# Altium PCB dev-board.PcbDoc (part 2 of 2)
Units mil, origin at the board's own origin, x right, y up, seen from the top; angles counter-clockwise.
Board outline 5607.36 x 5449.25 mil, 4 copper layers (Top Layer, Mid Layer 1, Mid Layer 2, Bottom Layer), stack 62.449 mil thick; 258 components, 114 nets, 705 pads, 139 vias.
Unrouted connection lines stored in the file: 225.
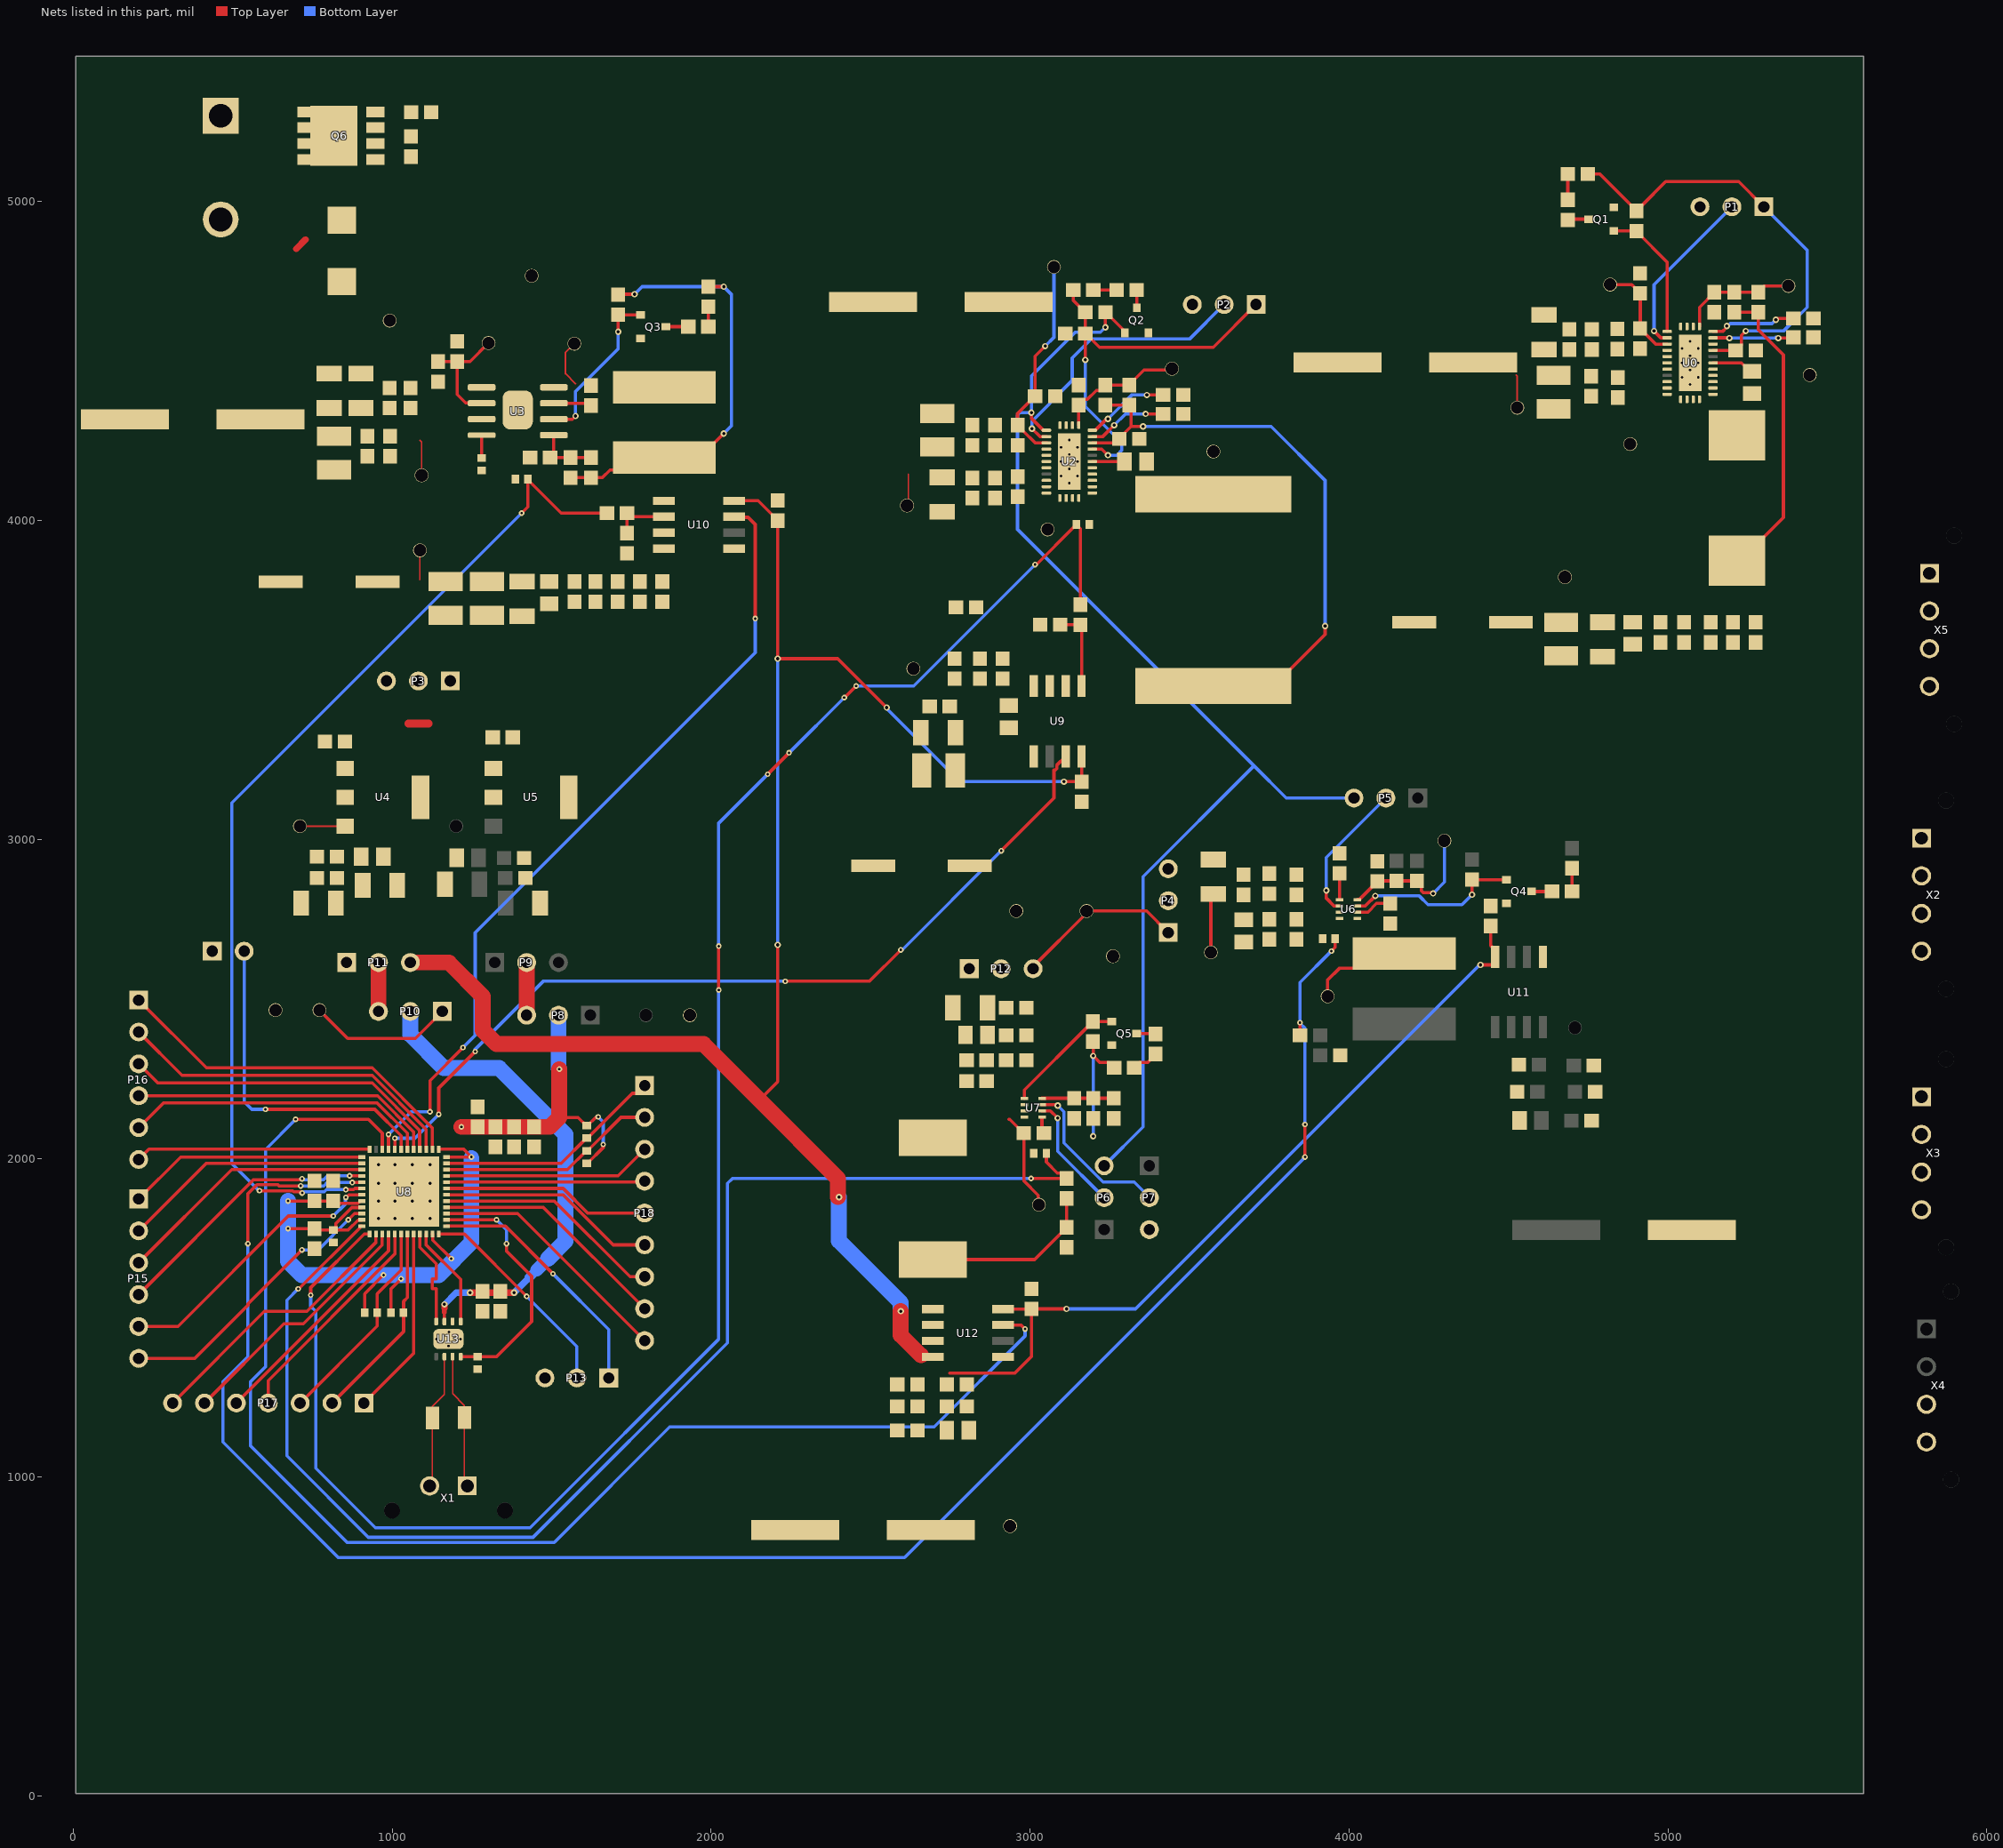
[diagram p2: the nets of this part, all layers, seen from the top]

## Via types
v1: diameter 20, hole 10, Top Layer to Bottom Layer, 59 vias
v2: diameter 17.72, hole 7.87, Top Layer to Bottom Layer, 56 vias
v3: diameter 11.81, hole 7.87, Top Layer to Bottom Layer, 24 vias

## Nets (pads, with @x,y where several pads share a name; then routed paths per layer and width w, separated by ;. In a path a pad name is that pad's centre, name@x,y a point inside that pad or via, vN(x,y) a via of type N, cw(c..) or ccw(c..) an arc to the next point about the centre after c; other vN are vias at no path point) (continued)
3V3_ONBOARD: P8.3 P9.2 | length 165.4
  Top Layer w50: P8.3@1421.26,2448.82 P9.2@1421.26,2614.17
3V3_TMP: R30.2 R33.2 U8.17 | length 6027
  Top Layer w10: v2(547.24,1732.28) 547.24,1888.67 575.69,1917.12 641.23,1917.12 644.97,1913.39 v2(712.6,1913.39) ; v2(874.58,1923.79) 875.2,1924.41 903.9,1924.41 U8.17@904.53,1925.04 ; R30.2@3846.46,2385.83 v2(3846.46,2425.2) ; v2(3862.2,2003.94) v2(3862.2,2106.3) ; v2(3944.88,2649.61) 3956.69,2661.42 R33.2@3956.69,2688.98
  Bottom Layer w10: v2(547.24,1732.28) 547.24,1377.95 468.5,1299.21 468.5,1110.24 830.71,748.03 2606.3,748.03 v2(3862.2,2003.94) ; v2(712.6,1913.39) 785.57,1913.41 795.95,1923.79 v2(874.58,1923.79) ; v2(3862.2,2106.3) 3862.2,2407.36 3846.46,2423.11 v2(3846.46,2425.2) 3846.46,2551.18 v2(3944.88,2649.61)
5V: C133.1 C134.1 P10.2 U13.3 | length 1539.3
  Top Layer w10: U13.3@1163.39,1488.19 1163.39,1517.72
  Top Layer w15: 1163.39,1517.72 1163.39,1529.53
  Top Layer w20: 1163.39,1529.53 v1(1163.39,1541.89) ; v1(1244.09,1578.74) v1(1381.89,1578.74)
  Bottom Layer w20: v1(1163.39,1541.89) 1200.23,1578.74 v1(1244.09,1578.74) ; v1(1381.89,1578.74) 1429.13,1625.98
  Bottom Layer w30: 1429.13,1625.98 1452.76,1649.61
  Bottom Layer w40: 1452.76,1649.61 1488.19,1685.04
  Bottom Layer w50: P10.2@1056.69,2460.63 1056.69,2388.19 1161.42,2283.46 1334.65,2283.46 1543.31,2074.8 1543.31,1740.16 1488.19,1685.04
5V_BUCK_MAIN: C43.1 C65.1 C100.1 C119.1 C124.1 C125.1 C126.1 C127.1 C128.1 C129.1 C130.1 P11.3 TP26.1 U9.8 U10.8 U11.8 U12.3 U12.4 U12.8 X5.P$1 X5.P$2 | length 8080.3
  Top Layer w10: U10.8@2072.05,4062.13 2147.52,4062.13 2208.66,4000.98 C65.1@2208.66,4000 v1(2208.66,3566.93) 2397.13,3566.93 v1(2550.33,3413.73) ; 2151.32,2182.82 2208.66,2240.16 v1(2208.66,2669.29) ; 2748.03,1326.77 2952.76,1326.77 3003.94,1377.95 C119.1@3003.94,1527.56 v1(3114.17,1527.56) ; U12.8@2915.24,1527.13 C119.1@3003.5,1527.13 ; v1(3106.3,3181.1) C43.1@3161.61,3181.1 U9.8@3161.61,3260.43 ; v1(4412.53,2606.65) 4450.51,2606.65 4458.31,2614.44 U11.8@4458.31,2631.61 4458.31,2653.27 4444.88,2666.69 C100.1@4444.88,2728.35
  Top Layer w50: P11.3@1056.69,2614.17 1177.17,2614.17 1283.46,2507.87 1283.46,2401.57 1326.77,2358.27 1975.87,2358.27 2151.32,2182.82 2397.64,1936.5 v1@2397.64,1878.3 ; v1(2594.49,1520.52) 2594.49,1496.9 2593.63,1496.05 2593.63,1449.67 2594.49,1448.82 2594.49,1444.88 2657.48,1381.89
  Bottom Layer w10: v1(2208.66,2669.29) v1(2208.66,3566.93) ; v1@2547.24,3413.39 2779.53,3181.1 v1(3106.3,3181.1) ; v1(3114.17,1527.56) 3330.71,1527.56 v1@4409.45,2606.3
  Bottom Layer w50: v1(2400.72,1878.3) 2400.72,1741.01 2594.49,1547.24 v1(2594.49,1520.52)
5V_BUCK_OUT: C121.1 C131.1 L5.2 R35.1 R37.1 R38.2 R39.1 U12.1 U12.2 | length 933.9
  Top Layer w10: L5.2@2694.76,1682.32 3014.02,1682.32 3114.17,1782.48 C121.1@3114.17,1783.46 R35.1@3114.17,1874.02 ; R38.2@3196.85,2366.14 3197.81,2365.18 v1(3197.81,2321.2) 3218.89,2300.12 3247.13,2300.12 R37.1@3263.78,2283.46
  Bottom Layer w10: v1(3197.76,2069.37) 3197.76,2323.56 v1@3198,2323.79
5V_CURR: U8.10 U12.7 | length 4341.1
  Top Layer w10: v2(696.85,2122.05) 925.2,2122.05 968.5,2078.74 U8.10@968.5,2028.39 ; U12.7@2915.24,1477.13 2971.69,1477.13 v2(2984.25,1464.57)
  Bottom Layer w10: v2(696.85,2122.05) 602.36,2027.56 602.36,1346.46 555.12,1299.21 555.12,1098.43 858.27,795.28 1507.87,795.28 1870.08,1157.48 2698.87,1157.48 2984.25,1442.87 v2(2984.25,1464.57)
5V_EXT: P10.1 TP29.1 | length 456.6
  Top Layer w10: TP29.1@771.65,2464.57 860.03,2376.19 1072.25,2376.19 1132.17,2436.1 P10.1@1156.69,2460.63
5V_LDO_OUT: C82.1 C83.1 C84.1 C85.2 C86.1 P11.1 TP19.1 U4.3 | length 141.9
  Top Layer w5: TP19.1@710.31,3041.57 U4.3@852.2,3041.57
5V_ONBOARD: P10.3 P11.2 | length 153.5
  Top Layer w50: P10.3@956.69,2460.63 P11.2@956.69,2614.17
5V_TMP: R35.2 R36.2 U8.24 | length 4244.2
  Top Layer w10: v2(704.72,1590.55) 706.2,1592.03 709.09,1592.03 898.7,1781.64 898.7,1786.34 899.61,1787.24 U8.24@904.3,1787.24 ; v2(3003.27,1936.74) 3003.53,1937.01 R35.2@3114.17,1937.01 3114.17,1937.2 3097.52,1953.85 3085.52,1953.85 3051.18,1988.19 R36.2@3051.18,2015.75
  Bottom Layer w10: v2(704.72,1590.55) 669.29,1555.12 669.29,1066.93 924.99,811.23 1441.15,811.23 2051.18,1421.26 2051.18,1921.26 2066.93,1937.01 2067.19,1936.74 v2(3003.27,1936.74)
12V_2A_BUCK_MAIN: C68.1 C69.1 C70.1 C71.1 C72.1 C73.1 C74.1 C75.1 C76.1 C77.1 P3.3 TP18.1 U10.3 U10.4 | length 91.9
  Top Layer w5: 1086.61,3814.96 TP18.1@1086.61,3906.89
12V_2A_BUCK_OUT: C78.1 C79.1 L3.2 R21.1 R23.1 R24.1 R25.1 U10.1 U10.2 | length 1591.2
  Top Layer w10: R25.1@1558.31,4134.53 1658.15,4134.53 1682.75,4159.13 1814.91,4159.13 L3.2@1853.31,4197.52 1963.54,4197.52 2039.06,4273.03 v1(2039.37,4273.03) ; R23.1@1708.31,4708.62 1709.72,4710.04 v1(1759.84,4710.04) ; C79.1@1736.22,3960.63 R24.1@1736.22,4023.62 1747.72,4012.13 U10.2@1851.57,4012.13 ; R21.1@1991.3,4733.66 v1(2039.37,4733.66)
  Bottom Layer w10: v1(1759.84,4710.04) 1783.46,4733.66 v1(2039.37,4733.66) 2062.99,4710.04 2062.99,4296.65 v1(2039.37,4273.03)
12V_2A_CURR: U8.9 U10.7 | length 2546.5
  Top Layer w10: U8.9@988.19,2028.39 v2(988.19,2074.8) ; v2(1118.11,2145.67) 1118.11,2243.76 v2(1221.8,2347.46) ; U10.7@2072.05,4012.13 2073.83,4010.35 2115.64,4010.35 2138.1,3987.89 v2(2138.1,3692.64)
  Bottom Layer w10: v2(988.19,2074.8) 1059.06,2145.67 v2(1118.11,2145.67) ; v2(1221.8,2347.46) 1259.84,2385.5 1259.84,2707.33 2138.1,3585.59 v2(2138.1,3692.64)
12V_2A_TMP: R24.2 R26.1 U8.18 | length 3277.5
  Top Layer w10: v2(583.5,1898.26) 583.82,1897.95 687.84,1897.95 691.24,1894.55 704.76,1894.55 ; 704.79,1894.53 716.72,1894.53 717.43,1893.82 v2(717.43,1891.19) ; v2(854.33,1901.57) 879.03,1901.57 882.81,1905.35 U8.18@904.53,1905.35 ; v2(1405.51,4023.62) 1425.2,4043.31 R26.1@1425.2,4127.95 ; R26.1@1425.2,4129.92 R26.1@1425.2,4127.95 ; R24.2@1673.23,4023.62 1529.53,4023.62 R26.1@1425.2,4127.95
  Bottom Layer w10: v2(583.5,1898.26) 582.05,1898.26 496.91,1983.41 496.91,3115.02 v2(1405.51,4023.62) ; v2(717.43,1891.19) 717.43,1894.55 786.51,1894.55 793.53,1901.57 v2(854.33,1901.57)
12V_5A_BOOT: C42.2 U2.6 | length 101.2
  Top Layer w10: U2.6@3194.88,4185.04 C42.2@3296.06,4185.04
12V_5A_CURR: U8.8 U9.7 | length 2743.9
  Top Layer w10: U8.8@1007.87,2028.39 v2(1007.87,2062.99) ; v2(1145.67,2137.8) 1145.67,2220.47 v2(1259.84,2334.65) ; v2(2232.28,2555.12) 2496.06,2555.12 v2(2594.49,2653.54) ; v2(2909.45,2964.57) 3074.8,3129.92 3074.8,3216.98 3078.14,3216.98 3083.41,3222.26 3083.41,3232.23 U9.7@3111.61,3260.43
  Bottom Layer w10: v2(1007.87,2062.99) 1070.87,2062.99 v2(1145.67,2137.8) ; v2(1259.84,2334.65) 1259.84,2341.89 1473.07,2555.12 v2(2232.28,2555.12) ; v2(2594.49,2653.54) 2598.43,2653.54 v2(2909.45,2964.57)
12V_5A_EN: R11.1 R13.1 TP9.1 U2.18 | length 657.9
  Top Layer w10: v1(3047.24,4547.24) 3015.75,4515.75 R13.1@3015.75,4389.76 3014.76,4389.76 2960.63,4335.63 R11.1@2960.63,4299.21 2960.63,4298.23 2977.28,4281.57 2978.27,4281.57 3015.67,4244.17 3051.1,4244.17 U2.18@3051.18,4244.09
  Bottom Layer w10: v1(3047.24,4547.24) 3074.8,4574.8 TP9.1@3074.8,4795.28
12V_5A_FB: C48.2 R17.2 R18.1 TP12.1 U2.12 | length 403.9
  Top Layer w10: U2.12@3152.56,4299.21 R18.1@3152.56,4362.2 3152.56,4363.19 3169.21,4379.84 3179.06,4379.84 3207.56,4408.35 3219.57,4408.35 3236.22,4425 C48.2@3236.22,4425.2 R17.2@3311.02,4425.2 3311.02,4426.18 3357.28,4472.44 3440.94,4472.44 TP12.1@3444.88,4476.38
12V_5A_MAIN: C44.1 C49.1 C50.1 C51.1 C52.1 C53.1 C54.1 C55.1 C56.1 P4.3 P12.1 TP11.1 U9.3 U9.4 X3.P$1 X3.P$2
12V_5A_MODE: P2.2 U2.17 | length 874.8
  Top Layer w10: v1(3005.97,4288.35) 3030.54,4263.78 U2.17@3051.18,4263.78
  Bottom Layer w10: v1@3005.97,4288.81 3005.97,4311.51 3061.08,4366.63 3061.08,4368.62 3131.95,4439.49 3131.95,4510.35 3191,4569.41 3499.98,4569.41 P2.2@3608.28,4677.72
12V_5A_OUT: C37.1 C39.1 C48.1 L2.2 R14.1 R17.1 U2.9 U9.1 U9.2 | length 2199.9
  Top Layer w10: C37.1@3094.49,3673.23 R14.1@3157.48,3673.23 3161.61,3669.09 U9.1@3161.61,3480.91 ; U2.9@3194.88,4244.09 3275.59,4244.09 3279.53,4248.03 C39.1@3280.51,4248.03 ; C48.1@3236.22,4362.2 R17.1@3311.02,4362.2 3316.48,4356.75 3316.48,4295.28 ; C39.1@3279.53,4251.97 3280.51,4251.97 3297.17,4268.62 3297.17,4275.97 3316.48,4295.28 ; v1(3354.33,4295.28) 3316.48,4295.28 ; L2.2@3574.8,3480.91 L2.2@3605.89,3480.91 ; L2.2@3657.48,3429.31 L2.2@3605.89,3480.91 ; v1(3925.2,3669.29) 3925.2,3642.82 3763.29,3480.91 L2.2@3605.89,3480.91
  Bottom Layer w10: v1(3354.33,4295.28) 3755.91,4295.28 3925.2,4125.98 v1(3925.2,3669.29)
12V_5A_PG: P5.3 P6.3 Q2.1 R12.1 U2.16 | length 3886.5
  Top Layer w10: v1(3003.94,4338.58) 3003.94,4321.02 3041.5,4283.46 U2.16@3051.18,4283.46 ; v1(3236.22,4606.3) R12.1@3236.22,4653.54 3237.2,4653.54 3290.08,4600.67 3290.08,4595.43 Q2.1@3296.89,4588.62
  Bottom Layer w10: P6.3@3232.28,1976.38 3354.33,2098.43 3354.33,2883.38 3702.01,3231.06 ; v1(3236.22,4606.3) 3220.47,4590.55 3141.73,4590.55 3003.94,4452.76 v1(3003.94,4338.58) 2968.5,4338.58 2960.63,4330.71 2960.63,3972.44 3702.01,3231.06 ; P5.3@4015.75,3129.92 3803.15,3129.92 3702.01,3231.06
12V_5A_RT: R16.1 U2.10 | length 251.8
  Top Layer w10: U2.10@3194.88,4263.78 3228.35,4263.78 v1(3263.78,4299.21) ; v1(3362.2,4334.65) R16.1@3417.32,4334.65
  Bottom Layer w10: v1(3263.78,4299.21) 3299.21,4334.65 v1(3362.2,4334.65)
12V_5A_SS: C41.1 U2.11 | length 264.2
  Top Layer w10: U2.11@3194.88,4283.46 3204.57,4283.46 3238.09,4316.98 3242.18,4316.98 v1(3244.09,4318.9) ; v1(3366.14,4393.7) C41.1@3417.32,4393.7
  Bottom Layer w10: v1(3244.09,4318.9) 3318.9,4393.7 v1@3362.2,4393.7
12V_5A_SW: C42.1 L2.1 TP10.1 U2.1 U2.2 U2.3 U2.4 U2.5
12V_5A_TMP: R14.2 R15.2 U8.25 | length 5798
  Top Layer w10: v2(744.09,1570.87) 744.09,1594.49 912.24,1762.64 U8.25@929.13,1762.64 ; v2(2023.62,2527.56) v2(2023.62,2665.35) ; v2(2177.17,3204.72) v2(2244.09,3271.65) ; v2(2417.32,3444.88) 2418.05,3444.88 v2(2454.49,3481.32) ; v2(3015.75,3862.2) 3019.68,3862.2 3136.89,3979.41 3138.86,3979.41 R15.2@3145.67,3986.22 ; R15.2@3145.67,3988.19 R15.2@3145.67,3986.22 ; R14.2@3157.48,3736.22 3157.48,3974.41 R15.2@3145.67,3986.22
  Bottom Layer w10: v2(744.09,1570.87) 744.09,1535.43 759.84,1519.69 759.84,1028.28 946.7,841.43 1431.98,841.43 2023.62,1433.07 v2(2023.62,2527.56) ; v2(2023.62,2665.35) 2023.62,3051.18 v2(2177.17,3204.72) ; v2(2244.09,3271.65) v2(2417.32,3444.88) ; v2(2454.49,3481.32) 2634.86,3481.32 v2(3015.75,3862.2)
12V_5A_VCC: C40.1 P2.1 R10.1 R12.2 U2.8 | length 1283.8
  Top Layer w10: R10.1@3135.39,4723.62 3135.39,4690.39 3173.23,4652.56 C40.1@3173.23,4586.61 3174.21,4586.61 3175.69,4585.14 3217.52,4543.31 3574.33,4543.31 P2.1@3708.74,4677.72 ; v1(3173.23,4503.94) 3173.23,4582.68 C40.1@3177.17,4586.61 ; U2.8@3194.88,4224.41 3224.72,4224.41 v1(3244.09,4205.04)
  Bottom Layer w10: v1(3173.23,4503.94) 3173.23,4358.27 3287.4,4244.09 3287.4,4220.47 3271.97,4205.04 v1(3244.09,4205.04)
12V_BUCK_IN: C93.1 C94.1 C95.1 C96.1 C97.1 C98.1 C112.1 C113.1 C114.1 C115.1 C116.1 C117.1 C118.1 C145.1 P4.2 P12.2 TP21.1 TP25.1 U6.3 U7.2 | length 186.3
  Top Layer w10: TP21.1@3566.93,2645.67 3566.93,2820.87 C93.1@3574.8,2828.74
12V_EXT: P3.1 P4.1 P12.3 TP32.1 | length 534.8
  Top Layer w10: P12.3@3009.45,2594.49 3009.45,2601.18 3177.17,2768.9 TP32.1@3177.17,2775.59 3365.59,2775.59 P4.1@3433.31,2707.87
12V_LDO_IN: C81.1 C87.1 P3.2 U4.1 U5.1 | length 63
  Top Layer w25: 1051.18,3363.58 1114.17,3363.58
24V_5A_BOOT: C13.2 U0.6 | length 133.3
  Top Layer w10: U0.6@5141.57,4494.61 5230.79,4494.61 5257.68,4467.72 C13.2@5263.78,4467.72
24V_5A_EN: R1.1 R2.1 TP3.1 U0.18 | length 322
  Top Layer w10: TP3.1@4818.9,4740.16 4886.81,4740.16 4913.39,4713.58 R2.1@4913.39,4712.6 R1.1@4913.39,4602.36 4913.39,4601.38 4930.04,4584.72 4930.83,4584.72 4961.89,4553.66 U0.18@4997.87,4553.66
24V_5A_FB: C27.2 R8.2 R9.1 TP6.1 U0.12 | length 368
  Top Layer w10: U0.12@5099.25,4608.78 5099.25,4669.13 5145.67,4715.55 R9.1@5145.67,4716.54 R8.2@5283.46,4716.54 5283.46,4717.52 5300.12,4734.17 5301.1,4734.17 5303.15,4736.22 TP6.1@5377.95,4736.22
24V_5A_MAIN: C15.1 C19.1 C20.1 C21.1 C22.1 C23.1 C24.1 C25.1 C26.1 C27.1 L1.2 R8.1 TP5.1 X2.P$1 X2.P$2 | length 953
  Top Layer w10: C27.1@5208.66,4653.54 R8.1@5283.46,4653.54 5283.46,4598.43 5362.2,4519.69 5362.2,4009.84 5226.38,3874.02 L1.2@5216.54,3874.02
24V_5A_MODE: P1.2 U0.17 | length 540.8
  Top Layer w10: v1(4956.69,4594.49) 4977.76,4573.43 4997.8,4573.43 U0.17@4997.87,4573.35
  Bottom Layer w10: v1(4956.69,4594.49) 4956.69,4740.16 P1.2@5200.79,4984.25
24V_5A_PG: Q1.1 R7.1 U0.16 | length 425.7
  Top Layer w10: Q1.1@4830.59,4908.11 R7.1@4901.22,4908.11 4901.22,4907.13 4997.87,4810.47 U0.16@4997.87,4593.03
24V_5A_RT: R5.1 U0.10 | length 247.1
  Top Layer w10: U0.10@5141.57,4573.35 5141.65,4573.27 5191.66,4573.27 v1(5192.72,4572.21) ; v1(5346.27,4572.21) 5391.1,4572.21 R5.1@5393.7,4574.8
  Bottom Layer w10: v1(5192.72,4572.21) 5335.99,4572.21 v1@5338.58,4574.8
24V_5A_SS: C12.1 U0.11 | length 271.1
  Top Layer w10: U0.11@5141.57,4593.03 5171.34,4593.03 5183.13,4604.82 5183.13,4608.32 v1(5185.04,4610.24) ; v1(5338.58,4629.92) 5341.29,4629.92 5345.23,4633.86 C12.1@5393.7,4633.86
  Bottom Layer w10: v1(5185.04,4610.24) 5187.75,4610.24 5195.62,4618.11 5326.77,4618.11 v1(5338.58,4629.92)
24V_5A_SW: C13.1 L1.1 TP4.1 U0.1 U0.2 U0.3 U0.4 U0.5
24V_5A_VCC: C11.1 P1.1 R6.1 R7.2 U0.8 | length 1410.7
  Top Layer w10: R6.1@4749.21,5086.61 4786.69,5086.61 R7.2@4901.22,4972.09 ; R7.2@4901.22,4971.1 R7.2@4901.22,4972.09 ; U0.8@5141.57,4533.98 C11.1@5212.6,4533.98 5213.58,4533.98 5230.24,4550.63 5230.24,4580.63 v1(5244.09,4594.49) ; P1.1@5300.79,4984.25 5222.05,5062.99 4993.11,5062.99 4918.86,4988.74 4917.87,4988.74 R7.2@4901.22,4972.09
  Bottom Layer w10: v1(5244.09,4594.49) 5362.2,4594.49 5437.01,4669.29 5437.01,4848.03 P1.1@5300.79,4984.25
BST_3V3_BUCK: C99.1 U6.6 | length 115.3
  Top Layer w10: U6.6@4025.87,2772.01 4059.37,2772.01 4086.57,2799.21 C99.1@4129.92,2799.21
BST_5V_BUCK: C123.1 U7.5 | length 53
  Top Layer w10: U7.5@3037.32,2129.21 3037.32,2084.72 C123.1@3043.31,2078.74
BST_12V_2A_BUCK: C67.1 U3.7 | length 119.9
  Top Layer w10: U3.7@1506.5,4367.99 1615.94,4367.99 C67.1@1623.31,4360.63
CAN_N: R3.1 U13.6 X1.P$2 | length 424.7
  Top Layer w3.72: X1.P$2@1117.12,972.44 1125.98,981.3 R3.1@1125.98,1185.04 1125.98,1222.33 1163.39,1259.73 U13.6@1163.39,1377.95
CAN_P: R3.2 U13.7 X1.P$1 | length 424.7
  Top Layer w3.72: U13.7@1188.98,1377.95 1188.98,1261.42 1226.38,1224.02 R3.2@1226.38,1186.73 1226.38,981.3 X1.P$1@1235.24,972.44
CAN_STB: R41.2 U8.38 U13.8 | length 789.2
  Top Layer w10: U8.38@1170.28,1806.93 1170.35,1807.01 1326.69,1807.01 v2(1326.77,1807.09) ; U13.8@1214.57,1377.95 R41.2@1267.72,1377.95 1326.77,1377.95 1437.01,1488.19 1437.01,1629.92 1358.27,1708.66 v2(1358.27,1732.28)
  Bottom Layer w10: v2(1326.77,1807.09) 1358.27,1775.59 v2(1358.27,1732.28)
EN_3V3_BUCK: P5.2 U6.2 | length 445.9
  Top Layer w10: v1@3929.13,2842.52 3929.13,2815.51 3953.03,2791.61 3970.67,2791.61 U6.2@3970.75,2791.69
  Bottom Layer w10: v1(3928.94,2839.92) 3928.94,2943.12 P5.2@4115.75,3129.92
EN_5V_BUCK: P6.2 U7.6 | length 368.5
  Top Layer w10: U7.6@3037.32,2148.9 3037.4,2148.82 3063.46,2148.82 v1(3086.3,2125.98)
  Bottom Layer w10: v1(3086.3,2125.98) 3086.61,2125.67 3086.61,2022.05 P6.2@3232.28,1876.38
EN_12V_2A_BUCK: R19.2 R20.1 TP14.1 U3.2 | length 374.5
  Top Layer w10: R19.2@1143.31,4498.62 1202.8,4498.62 R20.1@1203.31,4499.13 ; U3.2@1280.12,4367.99 1278.96,4369.15 1229.79,4369.15 1203.31,4395.63 R20.1@1203.31,4499.13 ; TP14.1@1301.81,4557.13 1243.82,4499.13 R20.1@1203.31,4499.13
FB_3V3_BUCK: C101.2 R31.2 R34.1 TP24.1 U6.8 | length 469.3
  Top Layer w10: U6.8@4025.87,2811.38 4032.6,2811.38 4071.65,2850.43 4071.65,2851.73 R34.1@4088.31,2868.39 4089.8,2869.88 C101.2@4148.31,2869.88 R31.2@4213.31,2869.88 4227.41,2855.78 4227.41,2838.48 4233.27,2832.62 4261.87,2832.62 v1(4263.78,2830.71)
  Bottom Layer w10: v1(4263.78,2830.71) 4299.21,2866.14 TP24.1@4299.21,2996.06
FB_5V_BUCK: C131.2 R39.2 R40.1 U7.8 | length 209.9
  Top Layer w10: U7.8@3037.32,2188.27 3122.2,2188.27 3182.2,2188.27 R40.1@3247.2,2188.27
FB_12V_2A_BUCK: C78.2 R25.2 R27.1 U3.5 | length 203.8
  Top Layer w10: U3.5@1506.5,4267.99 1506.5,4209.21 R27.1@1494.8,4197.52 R25.2@1558.31,4197.52 C78.2@1623.31,4197.52
FDCAN1_TX: U8.34 U13.1 | length 319.3
  Top Layer w10: U8.34@1106.3,1762.64 1106.3,1728.35 1214.57,1620.08 U13.1@1214.57,1488.19
FDCAN_RX: U8.33 U13.4 | length 319.3
  Top Layer w10: U8.33@1086.61,1762.64 1086.61,1720.47 1137.8,1669.29 1137.8,1645.67 1137.8,1621.61 1125.97,1621.61 1125.97,1591.61 1137.8,1591.61 1137.8,1586.61 U13.4@1137.8,1488.19
GND: C1.2 C2.2 C3.2 C4.2 C5.2 C6.2 C7.2 C8.2 C9.2 C10.2 C11.2 C12.2 C15.2 C19.2 C20.2 C21.2 C22.2 C23.2 C24.2 C25.2 C26.2 C29.2 C30.2 C31.2 C32.2 C33.2 C34.2 C35.2 C36.2 C37.2 C39.2 C40.2 C41.2 C43.2 C44.2 C49.2 C50.2 C51.2 C52.2 C53.2 C54.2 C55.2 C56.2 C58.2 C59.2 C60.2 C61.2 C62.2 C63.2 C64.2 C65.2 C68.2 C69.2 C70.2 C71.2 C72.2 C73.2 C74.2 C75.2 C76.2 C77.2 C79.2 C81.2 C82.2 C83.2 C84.2 C85.1 C86.2 C87.2 C88.2 C89.2 C90.2 C91.1 C92.2 C93.2 C94.2 C95.2 C96.2 C97.2 C98.2 C100.2 C102.2 C103.2 C104.2 C105.2 C106.2 C107.2 C108.2 C109.2 C112.2 C113.2 C114.2 C115.2 C116.2 C117.2 C118.2 C119.2 C121.2 C124.2 C125.2 C126.2 C127.2 C128.2 C129.2 C130.2 C133.2 C134.2 C135.2 C136.2 C137.2 C138.2 C140.2 C142.2 C144.2 C145.2 D8.2 P1.3 P2.3 P7.3 P13.3 P14.1 Q1.2 Q2.2 Q3.2 Q4.2 Q5.2 Q6.2 R2.2 R5.2 R9.2 R13.2 R15.1 R16.2 R18.2 R20.2 R22.2 R26.2 R27.2 R28.2 R33.1 R34.2 R36.1 R40.2 R41.1 R49.1 TP2.1 TP7.1 TP15.1 TP16.1 TP30.1 TP31.1 TP33.1 U0.9 U0.13 U0.14 U0.15 U0.19 U0.24 U0.25 U0.26 U0.27 U0.28 U0.29 U0.30 U0.31 U2.13 U2.14 U2.15 U2.19 U2.24 U2.25 U2.26 U2.27 U2.28 U2.29 U2.30 U2.31 U3.1 U3.9 U4.2 U5.2 U6.4 U7.4 U8.49 U9.5 U10.5 U11.5 U12.5 U13.2 U13.9 X2.P$3 X2.P$4 X3.P$3 X3.P$4 X4.P$3 X4.P$4 X5.P$3 X5.P$4
  other v1: 956.69,1811.02 1007.87,1811.02 1062.99,1811.02 1118.11,1811.02 956.69,1866.14 1007.87,1866.14 1062.99,1866.14 1118.11,1866.14 956.69,1921.26 1007.87,1921.26 1062.99,1921.26 1118.11,1921.26 956.69,1980.31 1007.87,1980.31 1062.99,1980.32 1118.11,1980.31
  other v3: 1176.18,1411.42 1138.78,1433.07 1213.58,1433.07 1178.15,1454.72 3123.03,4117.72 3097.44,4140.16 3148.62,4140.16 3123.03,4162.6 3097.44,4185.04 3148.62,4185.04 3123.03,4207.48 3097.44,4229.92 3148.62,4229.92 3123.03,4252.36 5069.72,4427.28 5044.13,4449.72 5095.31,4449.72 5069.72,4472.17 5044.13,4494.61 5095.31,4494.61 5069.72,4517.05 5044.13,4539.49 5095.31,4539.49 5069.72,4561.93
I2C1_SCL: P18.2 R45.1 U8.46 | length 689
  Top Layer w10: U8.46@1170.28,1964.41 1549.06,1964.41 1608.27,2023.62 R45.1@1610.24,2023.62 1612.2,2023.62 1716.93,2128.35 P18.2@1791.34,2128.35
I2C1_SDA: P18.1 R44.1 U8.47 | length 722.2
  Top Layer w10: U8.47@1170.28,1984.09 1529.37,1984.09 1608.27,2062.99 R44.1@1610.24,2062.99 1612.2,2062.99 1753.03,2203.82 1766.81,2203.82 P18.1@1791.34,2228.35
I2C2_SCL: P17.2 R47.1 U8.31 | length 630.2
  Top Layer w10: P17.2@811.02,1232.28 1035.43,1456.69 R47.1@1035.43,1517.72 ; R47.1@1035.43,1515.75 1035.43,1551.18 1047.24,1562.99 U8.31@1047.24,1762.64
I2C2_SDA: P17.3 R46.1 U8.30 | length 661.5
  Top Layer w10: P17.3@711.02,1232.28 952.76,1474.02 R46.1@952.76,1515.75 952.76,1574.8 1027.56,1649.61 U8.30@1027.56,1762.64
MODE_5V_BUCK: P7.2 U7.7 | length 514.4
  Top Layer w10: U7.7@3037.32,2168.58 3080.68,2168.58 3083.91,2165.35 v1(3086.61,2165.35)
  Bottom Layer w10: v1(3086.61,2165.35) 3106.3,2145.67 3106.3,2047.88 3228.98,1925.2 3326.77,1925.2 P7.2@3374.02,1877.95
NetD1_1: D1.1 R6.2 | length 80.5
  Top Layer w10: D1.1@4686.22,5006.1 R6.2@4686.22,5086.61
NetD1_2: D1.2 Q1.3 | length 66.6
  Top Layer w10: D1.2@4686.22,4943.11 4688.62,4945.51 Q1.3@4751.85,4945.51
NetD2_1: D2.1 R10.2 | length 72.9
  Top Layer w10: R10.2@3198.39,4723.62 D2.1@3271.3,4723.62
NetD2_2: D2.2 Q2.3 | length 56.3
  Top Layer w10: Q2.3@3334.29,4667.36 D2.2@3334.29,4723.62
NetD3_1: D3.1 R21.2 | length 62.4
  Top Layer w10: D3.1@1991.3,4608.23 R21.2@1991.3,4670.67
NetD3_2: D3.2 Q3.3 | length 70.6
  Top Layer w10: Q3.3@1857.68,4608.23 D3.2@1928.31,4608.23
NetD4_1: D4.1 R29.2 | length 72.8
  Top Layer w10: D4.1@4699.8,2836.61 R29.2@4699.8,2909.45
NetD4_2: D4.2 Q4.3 | length 64.1
  Top Layer w10: Q4.3@4572.68,2836.61 D4.2@4636.81,2836.61
NetD5_1: D5.1 R37.2 | length 85.4
  Top Layer w10: R37.2@3326.77,2283.46 3343.43,2300.12 3368.03,2300.12 3393.7,2325.79 D5.1@3393.7,2326.77
NetD5_2: D5.2 Q5.3 | length 59.9
  Top Layer w10: Q5.3@3334.65,2391.73 3391.73,2391.73 D5.2@3393.7,2389.76
NetJ1_1: J1.1 Q6.3
NetQ6_1: Q6.1 R48.2 R49.2
NRST: P14.2 U8.7 | length 1051.1
  Top Layer w10: v2(602.36,2153.54) 944.88,2153.54 1027.56,2070.87 U8.7@1027.56,2028.39
  Bottom Layer w10: P14.2@535.43,2649.61 535.43,2177.17 559.06,2153.54 v2(602.36,2153.54)
PA4: P16.6 U8.12 | length 737.8
  Top Layer w10: P16.6@204.72,1996.06 237.05,2028.39 U8.12@929.13,2028.39
PA5: P15.1 U8.13 | length 754.2
  Top Layer w10: P15.1@204.72,1872.44 336.06,2003.78 U8.13@904.53,2003.78
PA6: P15.2 U8.14 | length 787.5
  Top Layer w10: P15.2@204.72,1772.44 416.38,1984.09 U8.14@904.53,1984.09
PA7: P15.3 U8.15 | length 820.7
  Top Layer w10: P15.3@204.72,1672.44 496.69,1964.41 U8.15@904.53,1964.41
PA10: P17.1 U8.32 | length 594.9
  Top Layer w10: P17.1@911.02,1232.28 1066.93,1388.19 U8.32@1066.93,1762.64
PB2: P15.5 U8.19 | length 882.1
  Top Layer w10: P15.5@204.72,1472.44 327.66,1472.44 674.12,1818.9 v2(814.96,1818.9) ; v2(854.33,1877.13) 856.42,1877.13 865.04,1885.75 904.45,1885.75 U8.19@904.53,1885.67
  Bottom Layer w10: v2(814.96,1818.9) 852.85,1856.79 852.85,1875.65 v2(854.33,1877.13)
PB3: P18.7 U8.41 | length 719.5
  Top Layer w10: U8.41@1170.28,1865.98 1508.03,1865.98 1745.67,1628.35 P18.7@1791.34,1628.35
PB4: P18.6 U8.42 | length 686.2
  Top Layer w10: U8.42@1170.28,1885.67 1535.59,1885.67 1692.91,1728.35 P18.6@1791.34,1728.35
PB5: P18.5 U8.43 | length 653
  Top Layer w10: U8.43@1170.28,1905.35 1535.7,1905.35 1612.71,1828.35 P18.5@1791.34,1828.35
PB6: P18.4 U8.44 | length 622.4
  Top Layer w10: U8.44@1170.28,1925.04 1788.03,1925.04 P18.4@1791.34,1928.35
PB7: P18.3 U8.45 | length 655.7
  Top Layer w10: U8.45@1170.28,1944.72 1707.72,1944.72 P18.3@1791.34,2028.35
PB10: P15.6 U8.22 | length 890.2
  Top Layer w10: P15.6@204.72,1372.44 380.31,1372.44 547.69,1539.81 547.69,1543.75 v2(716.54,1712.6) ; v2(862.2,1807.09) 881.73,1826.61 U8.22@904.53,1826.61
  Bottom Layer w10: v2(716.54,1712.6) 767.72,1712.6 v2(862.2,1807.09)
PB13: P17.7 U8.26 | length 873
  Top Layer w10: P17.7@311.02,1232.28 598.43,1519.68 732.28,1519.68 947.91,1735.31 947.91,1761.73 U8.26@948.82,1762.64
PB14: P17.6 U8.27 | length 797.2
  Top Layer w10: P17.6@411.02,1232.28 659.62,1480.88 721.03,1480.88 967.6,1727.44 967.6,1761.73 U8.27@968.5,1762.64
PB15: P17.5 U8.28 | length 728
  Top Layer w10: P17.5@511.02,1232.28 988.19,1709.45 U8.28@988.19,1762.64
PC4: P15.4 U8.16 | length 859
  Top Layer w10: P15.4@204.72,1572.44 565.35,1933.07 716.54,1933.07 716.54,1935.14 v2(717.05,1935.66) ; v2(866.14,1944.88) 866.22,1944.8 904.45,1944.8 U8.16@904.53,1944.72
  Bottom Layer w10: v2(717.05,1935.66) 717.05,1933.07 785.43,1933.07 797.24,1944.88 v2(866.14,1944.88)
PC6: P17.4 U8.29 | length 694.7
  Top Layer w10: P17.4@611.02,1232.28 611.02,1302.76 1007.87,1699.61 U8.29@1007.87,1762.64
PC10: P18.9 U8.39 | length 786
  Top Layer w10: U8.39@1170.28,1826.61 1393.07,1826.61 P18.9@1791.34,1428.35
PC11: P18.8 U8.40 | length 752.8
  Top Layer w10: U8.40@1170.28,1846.3 1473.39,1846.3 P18.8@1791.34,1528.35
PC13: P16.1 U8.2 | length 1153.7
  Top Layer w10: P16.1@204.72,2496.06 417.32,2283.46 937.01,2283.46 1125.98,2094.49 U8.2@1125.98,2028.39
PC14: P16.2 U8.3 | length 1090.3
  Top Layer w10: P16.2@204.72,2396.06 340.94,2259.84 937.01,2259.84 1106.3,2090.55 U8.3@1106.3,2028.39
PC15: P16.3 U8.4 | length 1026.9
  Top Layer w10: P16.3@204.72,2296.06 264.57,2236.22 937.01,2236.22 1085.71,2087.52 1085.71,2029.29 U8.4@1086.61,2028.39
PF0: P16.4 U8.5 | length 963.5
  Top Layer w10: P16.4@204.72,2196.06 953.54,2196.06 1066.93,2082.68 U8.5@1066.93,2028.39
PF1: P16.5 U8.6 | length 964
  Top Layer w10: P16.5@204.72,2096.06 281.89,2173.23 952.76,2173.23 1047.24,2078.74 U8.6@1047.24,2028.39
PG_3V3_BUCK: Q4.1 R32.2 U6.7 | length 552.7
  Top Layer w10: U6.7@4025.87,2791.69 4025.94,2791.77 4051.61,2791.77 v1(4082.68,2822.83) ; v1(4385.83,2826.77) R32.2@4385.83,2874.02 Q4.1@4493.94,2874.02
  Bottom Layer w10: v1(4082.68,2822.83) 4220.47,2822.83 4248.03,2795.28 4354.33,2795.28 v1(4385.83,2826.77)
PG_5V_BUCK: Q5.1 R38.1 U7.1 | length 389.4
  Top Layer w10: U7.1@2982.2,2188.27 2982.2,2214.49 3179.21,2411.5 3180.2,2411.5 3196.85,2428.15 R38.1@3196.85,2429.13 Q5.1@3255.91,2429.13
PG_12V_2A_BUCK: Q3.1 R23.2 U3.6 | length 516.2
  Top Layer w10: U3.6@1506.5,4317.99 1564.65,4317.99 v1(1574.8,4328.15) ; v1(1708.6,4591.98) 1708.6,4645.34 R23.2@1708.31,4645.63 Q3.1@1778.94,4645.63
  Bottom Layer w10: v1(1574.8,4328.15) 1574.8,4405.51 1708.6,4539.3 v1(1708.6,4591.98)
RT_3V3_BUCK: R28.1 U6.1 | length 82.3
  Top Layer w10: U6.1@3970.75,2811.38 R28.1@3970.75,2893.7
RT_12V_2A_BUCK: R22.1 U3.4 | length 71.2
  Top Layer w10: R22.1@1280.12,4196.81 U3.4@1280.12,4267.99
SW_3V3_BUCK: C99.2 L4.1 TP22.1 U6.5 | length 325.6
  Top Layer w10: TP22.1@3933.07,2507.87 3933.07,2559.06 3969.57,2595.55 4127.05,2595.55 L4.1@4173.23,2641.73
SW_5V_BUCK: C123.2 L5.1 TP27.1 U7.3 | length 309.2
  Top Layer w10: 2933.07,2122.05 2936.02,2122.05 2979.33,2078.74 C123.2@2980.31,2078.74 2980.31,1929.13 3025.42,1884.03 3025.42,1856.47 TP27.1@3027.56,1854.33
SW_12V_2A_BUCK: C67.2 L3.1 TP17.1 U3.8 | length 150.4
  Top Layer w5: TP17.1@1570.87,4555.12 1543.31,4527.56 1543.31,4460.63 1574.8,4429.13
SWCLK: P13.1 U8.37 | length 794.7
  Top Layer w10: U8.37@1170.28,1787.24 1354.49,1787.24 v2(1503.94,1637.8)
  Bottom Layer w10: v2(1503.94,1637.8) 1678.74,1462.99 P13.1@1678.74,1311.02
SWDIO: P13.2 U8.36 | length 678.2
  Top Layer w10: U8.36@1145.67,1762.64 1226.28,1762.64 1421.26,1567.65 v2(1421.26,1566.93)
  Bottom Layer w10: v2(1421.26,1566.93) 1578.74,1409.45 P13.2@1578.74,1311.02
VBAT: C1.1 C2.1 C3.1 C4.1 C5.1 C6.1 C7.1 C8.1 C29.1 C30.1 C31.1 C32.1 C33.1 C34.1 C35.1 C36.1 C58.1 C59.1 C60.1 C61.1 C62.1 C63.1 C64.1 C144.1 D8.1 J1.2 R1.2 R11.2 R19.1 R48.1 TP1.1 TP8.1 TP13.1 U0.20 U0.21 U0.22 U2.20 U2.21 U2.22 U3.3 | length 357.8
  Top Layer w5: 1086.61,4251.97 1091.81,4246.77 TP13.1@1091.81,4142.13 ; TP8.1@2614.17,4047.24 2618.11,4051.18 2618.11,4145.67 ; 4523.62,4456.69 4527.56,4452.76 TP1.1@4527.56,4354.33
  Top Layer w20: 698.82,4852.36 728.35,4881.89
VBAT_MCU: C9.1 C10.1 C135.1 C136.1 C137.1 C138.1 C140.1 C142.1 P8.2 R44.2 R45.2 R46.2 R47.2 U8.1 U8.20 U8.21 U8.23 U8.35 U8.48 | length 3211.8
  Top Layer w10: v2(673.23,1779.53) C10.1@755.91,1779.53 759.84,1775.59 C142.1@814.96,1775.59 C142.1@815.65,1775.59 ; v2(673.23,1866.14) C140.1@755.91,1866.14 756.06,1865.98 C9.1@814.96,1865.98 ; C9.1@814.96,1866.14 822.83,1858.27 892.84,1858.27 898.7,1864.13 898.7,1865.08 899.61,1865.98 U8.20@904.53,1865.98 ; U8.23@904.53,1806.93 903.62,1806.02 892.64,1806.02 862.2,1775.59 C142.1@815.65,1775.59 ; U8.21@904.53,1846.3 903.62,1845.39 872.95,1845.39 822.46,1794.9 822.46,1782.4 C142.1@815.65,1775.59 ; R46.2@913.39,1515.75 913.39,1574.8 v2(972.44,1633.86) ; R47.2@996.06,1515.75 996.06,1590.55 v2(1027.56,1622.05) ; U8.35@1125.98,1762.64 1126.89,1761.73 1126.89,1743.19 v2(1185.04,1685.04) ; U8.1@1145.67,2028.39 1223.58,2028.39 v2(1248.03,2003.94) 1247.87,2003.78 U8.48@1170.28,2003.78 ; 1523.62,2127.71 1582.92,2127.71 1608.27,2102.36 R44.2@1610.24,2102.36 1612.2,2102.36 1638.29,2128.44 1644.19,2128.44 v2(1645.67,2129.92) ; R45.2@1610.24,1984.25 1612.2,1984.25 1661.42,2033.46 v2(1661.42,2043.31)
  Top Layer w50: v2(1216.54,2098.43) C138.1@1267.72,2098.43 C137.1@1322.83,2098.43 C136.1@1381.89,2098.43 C135.1@1444.88,2098.43 1494.33,2098.43 1523.62,2127.71 v2(1523.62,2279.53)
  Bottom Layer w10: v2(1645.67,2129.92) 1661.42,2114.17 v2(1661.42,2043.31)
  Bottom Layer w50: v2(673.23,1866.14) v2(673.23,1779.53) 673.23,1677.17 716.54,1633.86 v2(972.44,1633.86) 1145.67,1633.86 1248.03,1736.22 v2@1248.03,2000 ; P8.2@1521.26,2448.82 1521.26,2281.89 v2(1523.62,2279.53)
pads on no net: P5.1 P6.1 P7.1 U0.7 U0.23 U2.7 U2.23 U9.6 U10.6 U11.6 U12.6 U13.5 X1.1 X2.1 X3.1 X4.1 X5.1

## Polygon pours and split planes (outlines as drawn)
3V3_BUCK_MAIN on Top Layer "3V3_BUCK_MAIN_L01_P049" (solid, pour order 49): 4543.31,2460.63 4547.24,2456.69 4720.47,2456.69 4736.22,2440.94 4736.22,2059.06 4791.34,2003.94 4791.34,1744.09 4783.46,1736.22 4783.46,1732.28 4519.69,1732.28 4503.94,1748.03 4500,1748.03 4500,2027.56 4562.99,2090.55 4562.99,2350.39 4539.37,2374.02 4539.37,2452.76 4543.31,2456.69
3V3_LDO_OUT on Top Layer "3V3_LDO_OUT_L01_P051" (solid, pour order 51): 1240.16,2602.36 1248.03,2602.36 1283.46,2566.93 1354.33,2566.93 1381.89,2594.49 1381.89,3039.37 1346.46,3074.8 1283.46,3074.8 1240.16,3027.56 1240.16,3023.62 1240.16,2681.1
5V_LDO_OUT on Top Layer "5V_LDO_OUT_L01_P050" (solid, pour order 50): 889.76,2570.87 901.57,2582.68 901.57,2665.35 937.01,2700.79 937.01,3019.69 881.89,3074.8 814.96,3074.8 795.28,3055.12 795.28,2590.55 814.96,2570.87
3V3_BUCK_OUT on Top Layer "3V3_BUCK_OUT_L01_P047" (solid, pour order 47): 4015.75,2484.25 4003.94,2472.44 4003.94,2374.02 4015.75,2362.2 4515.75,2362.2 4527.56,2374.02 4527.56,2440.94 4484.25,2484.25
SW_3V3_BUCK on Top Layer "SW_3V3_BUCK_L01_P046" (solid, pour order 46): 4015.75,2763.78 4181.1,2763.78 4244.09,2700.79 4330.71,2700.79 4338.58,2692.91 4338.58,2594.49 4330.71,2586.61 4015.75,2586.61 4007.87,2594.49 4007.87,2755.91
12V_BUCK_IN on Top Layer "12V_BUCK_IN_L01_P044" (solid, pour order 44): 3421.52,2858.53 3397.64,2834.65 3397.64,2783.46 3429.13,2751.97 3484.25,2751.97 3484.25,2748.03 3511.81,2720.47 3913.39,2720.47 3956.69,2763.78 3984.25,2763.78 3988.19,2767.72 3988.19,2775.59 3984.25,2779.53 3948.82,2779.53 3869.82,2858.53
12V_5A_MAIN on Top Layer "12V_5A_MAIN_L01_P042" (solid, pour order 42): 3460.63,2948.82 3476.38,2933.07 3476.38,2881.89 3464.57,2870.08 2877.95,2870.08 2877.95,2948.82
24V_5A_MAIN on Top Layer "24V_5A_MAIN_L01_P041" (solid, pour order 41): 5314.96,3948.82 5314.96,3665.35 5295.28,3645.67 4440.94,3645.67 4425.2,3661.42 4425.2,3700.79 4456.69,3732.28 5051.18,3732.28 5118.11,3799.21 5118.11,3948.82 5129.92,3960.63 5303.15,3960.63
VBAT on Top Layer "VBAT_L01_P018" (solid, pour order 18): 669.29,5039.37 4539.37,5039.37 4539.37,4872.05 669.29,4872.05
24V_5A_SW on Top Layer "24V_5A_SW_L01_P040" (solid, pour order 40): 5129.92,4484.25 5122.05,4476.38 5122.05,4188.98 5129.92,4181.1 5303.15,4181.1 5311.02,4188.98 5311.02,4362.2 5299.21,4374.02 5299.21,4421.26 5291.34,4429.13 5236.22,4429.13 5181.1,4484.25
VBAT on Top Layer "VBAT_L01_P039" (solid, pour order 39): 4539.37,4594.49 4566.93,4566.93 4929.13,4566.93 4972.44,4523.62 5015.75,4523.62 5019.69,4519.69 5019.69,4468.5 5015.75,4464.57 4980.31,4464.57 4937.01,4421.26 4287.4,4421.26 4248.03,4460.63 4248.03,4854.33 4220.47,4881.89 4539.37,4881.89
5V_BUCK_MAIN on Top Layer "5V_BUCK_MAIN_L01_P038" (solid, pour order 38): 2728.35,1444.88 2732.28,1440.94 2732.28,1362.2 2767.72,1326.77 2767.72,1110.24 2834.65,1043.31 2834.65,799.21 2822.83,787.4 2555.12,787.4 2539.37,803.15 2539.37,1043.31 2614.17,1118.11 2614.17,1421.26 2637.8,1444.88
5V_BUCK_OUT on Top Layer "5V_BUCK_OUT_L01_P037" (solid, pour order 37): 2598.43,1751.97 2578.74,1732.28 2578.74,1618.11 2653.54,1543.31 2653.54,1464.57 2661.42,1456.69 2728.35,1456.69 2736.22,1464.57 2736.22,1551.18 2811.02,1625.98 2811.02,1736.22 2795.28,1751.97
12V_5A_MAIN on Top Layer "12V_5A_MAIN_L01_P036" (solid, pour order 36): 3086.61,3452.76 3074.8,3440.94 2992.13,3440.94 2964.57,3413.39 2964.57,3397.64 2952.76,3385.83 2905.51,3385.83 2889.76,3370.08 2889.76,2677.17 2720.47,2677.17 2720.47,3515.75 2736.22,3531.5 3074.8,3531.5 3086.61,3519.68
SW_5V_BUCK on Top Layer "SW_5V_BUCK_L01_P034" (solid, pour order 34): 3000,2145.67 2996.06,2141.73 2968.5,2141.73 2830.71,2003.94 2586.61,2003.94 2582.68,2007.87 2582.68,2118.11 2622.05,2157.48 2996.06,2157.48 3000,2153.54
12V_BUCK_IN on Top Layer "12V_BUCK_IN_L01_P031" (solid, pour order 31): 2889.76,2629.92 2858.27,2598.43 2858.27,2535.43 2838.58,2515.75 2838.58,2188.98 2866.14,2161.42 2992.13,2161.42 2996.06,2165.35 2996.06,2173.23 2992.13,2177.17 2964.57,2177.17 2948.82,2200.79 2948.82,2208.66 2948.82,2618.11 2937.01,2629.92
12V_5A_MAIN on Top Layer "12V_5A_MAIN_L01_P030" (solid, pour order 30): 2771.65,2566.93 2779.53,2559.06 2838.58,2559.06 2846.46,2566.93 2846.46,2606.3 2889.76,2649.61 2889.76,2677.17 2720.47,2677.17 2720.47,2663.39 2771.65,2607.09
12V_5A_SW on Top Layer "12V_5A_SW_L01_P025" (solid, pour order 25): 3515.75,4133.86 3539.37,4157.48 3539.37,4236.22 3551.18,4248.03 3598.43,4248.03 3610.24,4236.22 3610.24,4153.54 3629.92,4133.86 3523.62,4133.86
12V_5A_OUT on Top Layer "12V_5A_OUT_L01_P023" (solid, pour order 23): 3102.36,3523.62 3094.49,3515.75 3094.49,3444.88 3098.43,3440.94 3185.04,3440.94 3210.56,3415.43 3820.94,3415.43 3830.71,3425.2 3830.71,3535.92 3817.5,3545.84 3199.39,3545.84 3177.17,3523.62
12V_5A_SW on Top Layer "12V_5A_SW_L01_P022" (solid, pour order 22): 3326.77,4137.8 3338.58,4149.61 3338.58,4212.6 3342.52,4216.54 3389.76,4216.54 3393.7,4212.6 3393.7,4153.54 3409.45,4137.8
12V_5A_SW on Top Layer "12V_5A_SW_L01_P021" (solid, pour order 21): 3181.1,4173.23 3177.17,4169.29 3177.17,4082.68 3181.1,4078.74 3208.66,4078.74 3263.78,4023.62 3818.9,4023.62 3822.83,4027.56 3822.83,4137.8 3818.9,4141.73 3275.59,4141.73 3244.09,4173.23
VBAT on Top Layer "VBAT_L01_P020" (solid, pour order 20): 2366.14,4842.06 2366.14,4842.52 2318.9,4889.76 2696.85,4889.76 2649.15,4842.06
VBAT on Top Layer "VBAT_L01_P019" (solid, pour order 19): 3070.87,4161.42 3066.93,4157.48 3031.5,4157.48 2984.25,4110.24 2539.37,4110.24 2366.14,4283.46 2366.14,4842.06 2445.34,4842.06 2649.15,4842.06 2649.15,4283.92 2669.29,4263.78 2980.32,4263.78 3031.5,4212.6 3066.93,4212.6 3070.87,4208.66 3070.87,4165.35
12V_LDO_IN on Top Layer "12V_LDO_IN_L01_P017" (solid, pour order 17): 1047.24,3410.83 1118.11,3410.83 1185.04,3343.9 1338.58,3343.9 1350.39,3332.09 1350.39,3198.23 1346.46,3194.29 1287.4,3194.29 1283.46,3198.23 1283.46,3288.78 1275.59,3296.65 1161.42,3296.65
12V_LDO_IN on Top Layer "12V_LDO_IN_L01_P015" (solid, pour order 15): 1047.24,3410.83 968.5,3332.09 826.77,3332.09 818.9,3324.21 818.9,3198.23 822.83,3194.29 877.95,3194.29 881.89,3198.23 881.89,3276.97 889.76,3284.84 992.13,3284.84 1118.11,3410.83
12V_LDO_IN on Top Layer "12V_LDO_IN_L01_P014" (solid, pour order 14): 1059.06,3532.87 1047.24,3521.06 1047.24,3410.83 1118.11,3410.83 1118.11,3521.06 1106.3,3532.87
12V_2A_BUCK_MAIN on Top Layer "12V_2A_BUCK_MAIN_L01_P009" (solid, pour order 9): 877.95,3788.78 877.95,3536.81 956.69,3458.07 1023.62,3458.07 1023.62,3745.47 1066.93,3788.78
12V_2A_BUCK_MAIN on Top Layer "12V_2A_BUCK_MAIN_L01_P008" (solid, pour order 8): 877.95,3828.15 877.95,3773.03 1870.08,3773.03 1889.76,3792.72 1889.76,3973.82 1885.83,3977.76 1814.96,3977.76 1811.02,3973.82 1811.02,3875.39 1775.59,3839.96 889.76,3839.96
12V_2A_BUCK_OUT on Top Layer "12V_2A_BUCK_OUT_L01_P006" (solid, pour order 6): 1691.81,4252.13 1686.81,4247.13 1686.81,4147.13 1811.81,4082.13 1811.81,4002.13 1816.81,3997.13 1886.81,3997.13 1891.81,4002.13 1891.81,4082.13 2016.81,4142.13 2016.81,4247.13 2011.81,4252.13
SW_12V_2A_BUCK on Top Layer "SW_12V_2A_BUCK_L01_P005" (solid, pour order 5): 1466.81,4432.13 1461.81,4427.13 1461.81,4412.13 1466.81,4407.13 1546.81,4407.13 1556.81,4397.13 1651.81,4397.13 1686.81,4362.13 2016.81,4362.13 2021.81,4367.13 2021.81,4472.13 2016.81,4477.13 1671.81,4477.13 1646.81,4452.13 1566.81,4452.13 1546.81,4432.13
no net on Top Layer "NONET_L01_P004" (solid, pour order 4): 1161.81,4232.13 1136.81,4207.13
VBAT on Top Layer "VBAT_L01_P003" (solid, pour order 3): 1121.81,4462.13 1116.81,4457.13 1116.81,4397.13 1101.81,4382.13 1183.81,4382.13 1166.81,4399.13 1166.81,4457.13 1161.81,4462.13
VBAT on Top Layer "VBAT_L01_P002" (solid, pour order 2): 1326.81,4325.13 1320.81,4331.13 1234.81,4331.13 1183.81,4382.13 756.81,4382.13 716.81,4422.13 716.81,5040.75 444.87,5040.75 386.81,4982.69 386.81,4287.13 446.81,4232.13 451.81,4232.13 1161.81,4232.13 1231.81,4302.13 1321.81,4302.13 1326.81,4307.13 1326.81,4327.13
VBAT_MCU on Bottom Layer "VBAT_MCU_L04_P060" (solid, pour order 60): 1224.41,2051.18 1192.91,2082.68 1192.91,2118.11 1196.85,2122.05 1244.09,2122.05 1271.65,2094.49 1271.65,1992.13 1259.84,1980.32 1232.28,1980.32 1232.28,1992.13 1224.41,2000

## Silkscreen, mask and mechanical layers (free items; w line width, h text height)
Mechanical 1:
  the board outline again, w10